# Altium PCB led_drv.PcbDoc
Units mm, origin at the board's own origin, x right, y up, seen from the top; angles counter-clockwise.
Board outline 90 x 50 mm, 2 copper layers (Top Layer, Bottom Layer); 90 components, 96 nets, 338 pads, 59 vias.
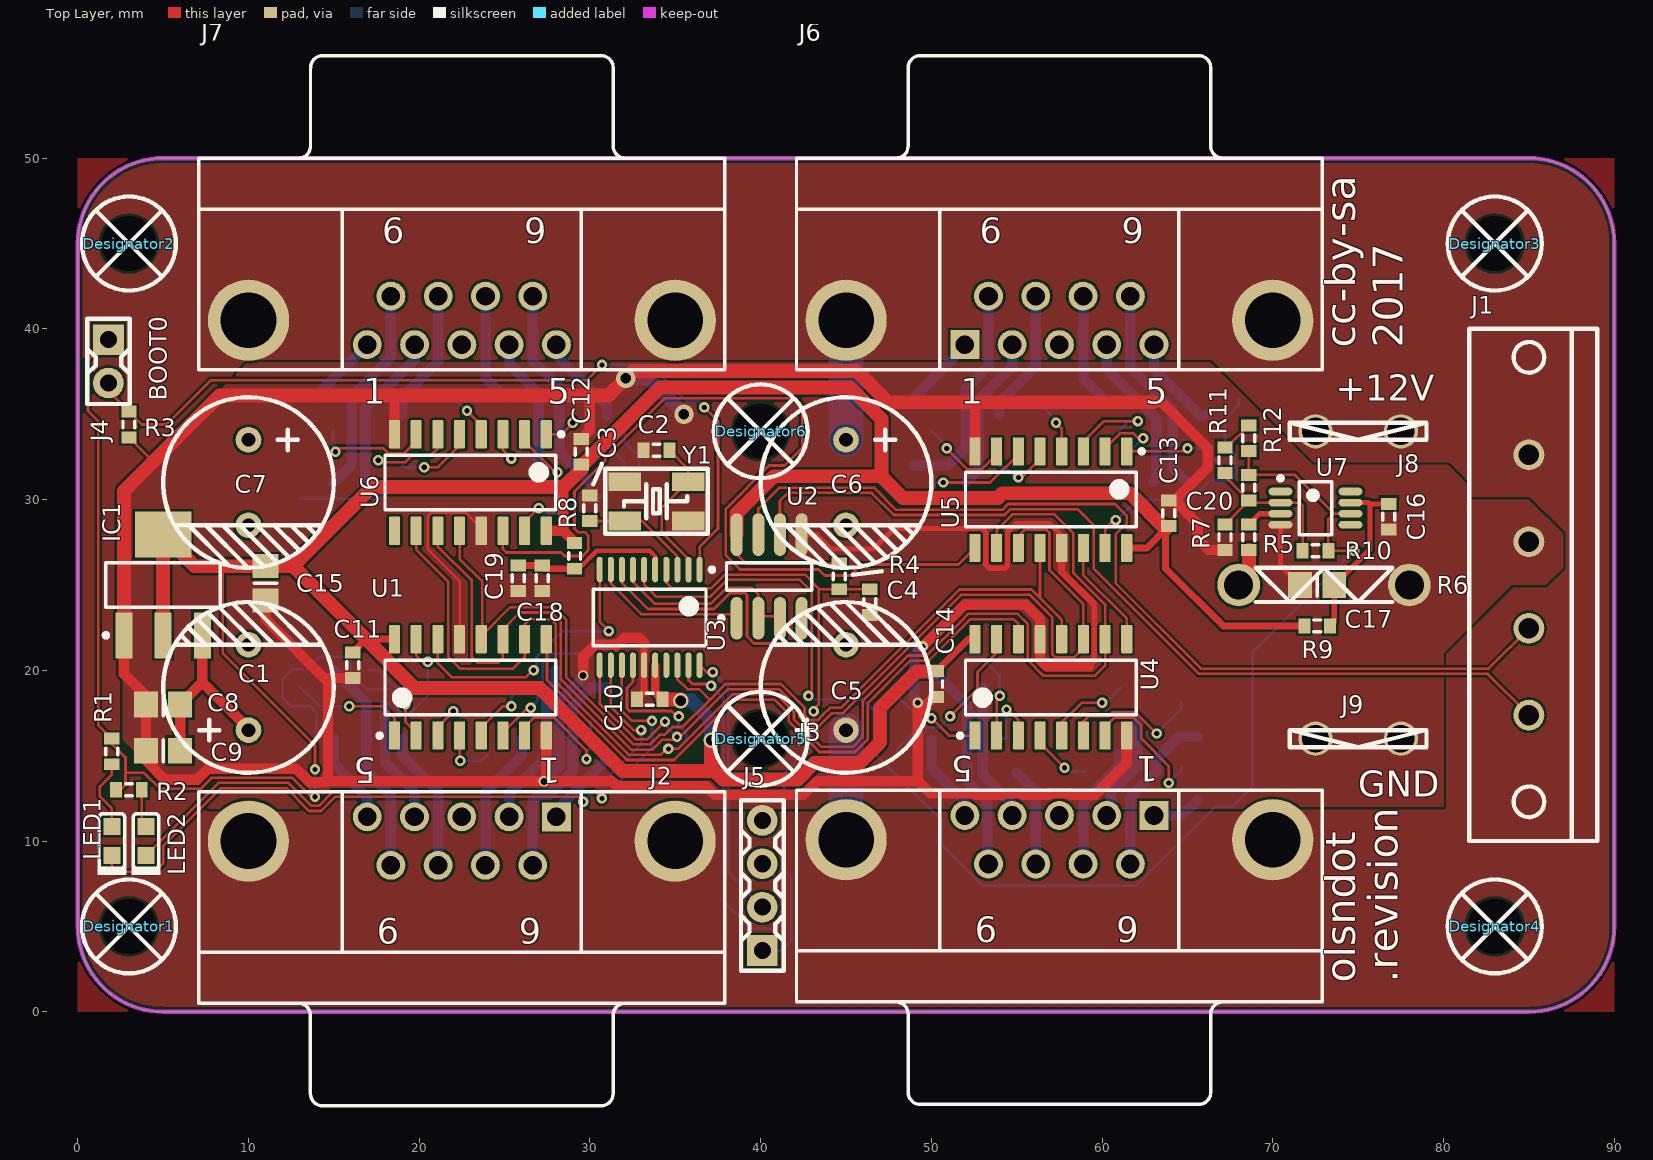
[diagram p0: Top Layer view]
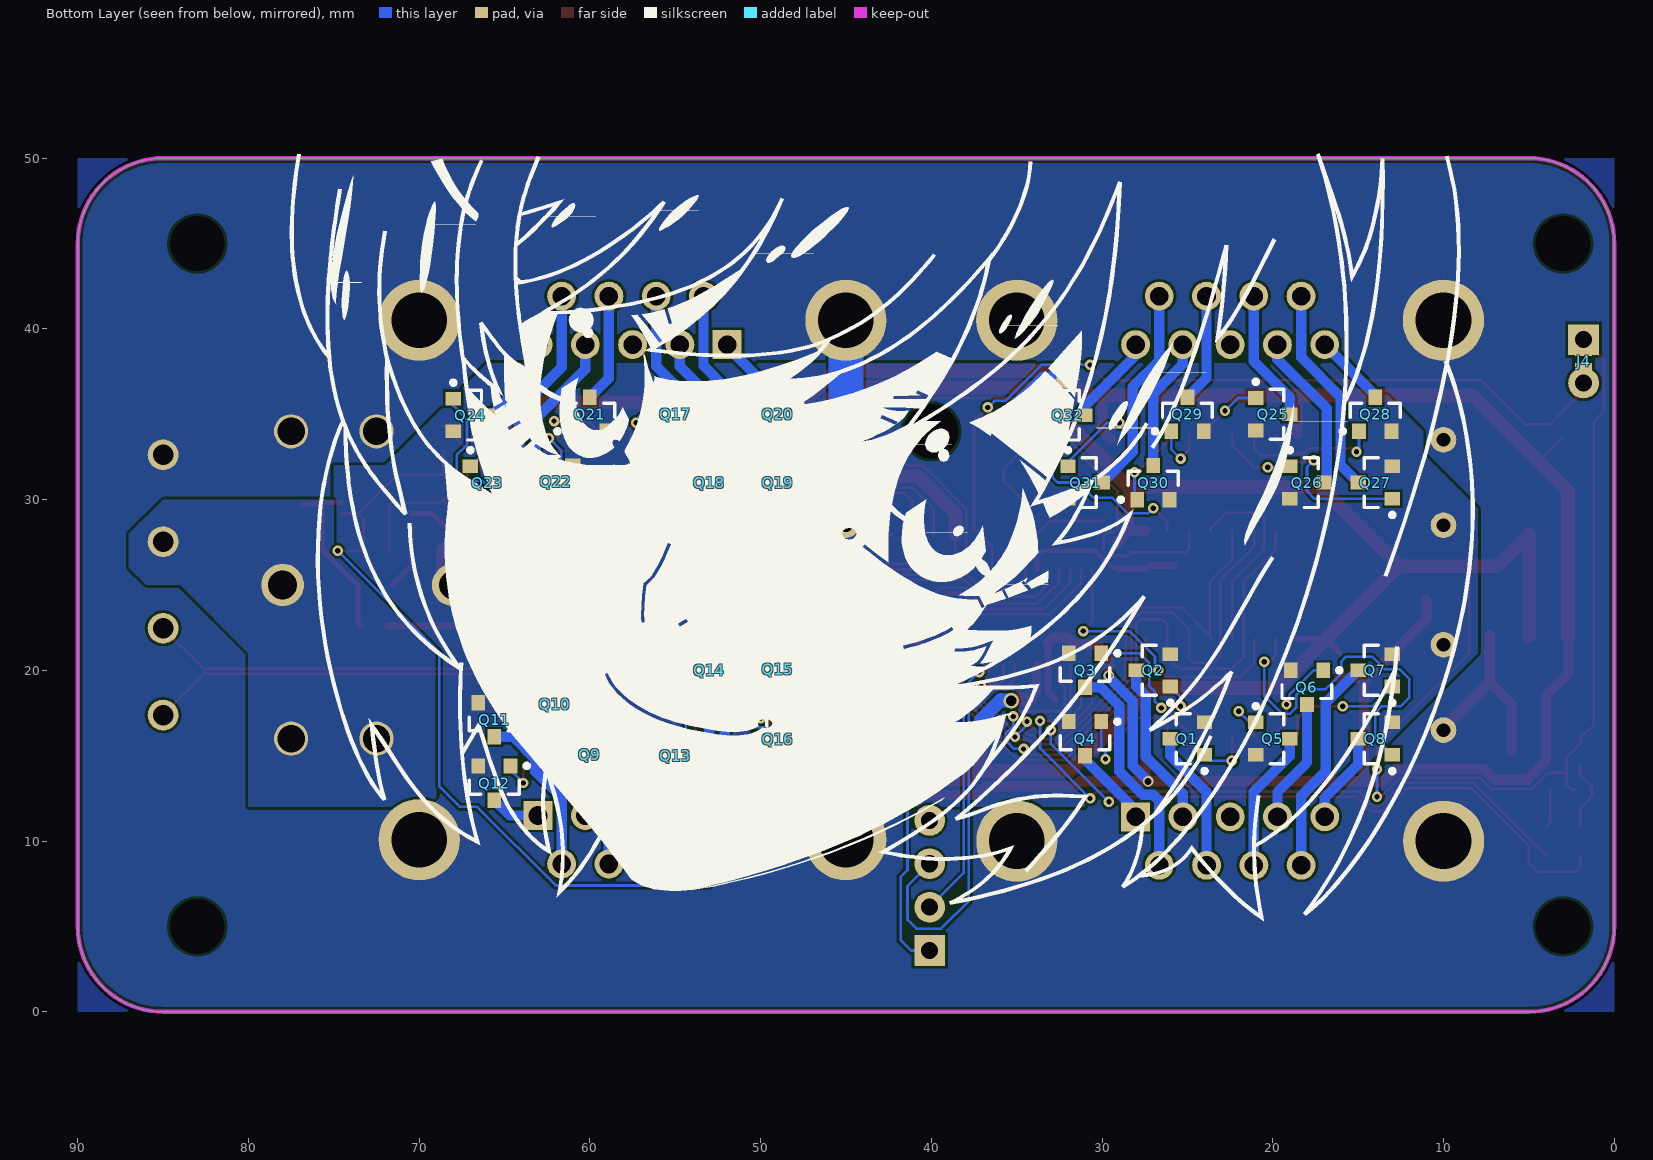
[diagram p1: Bottom Layer view, seen from below]

## Layer stack, top to bottom
Top Solder: solder mask 0.0102, Solder Resist, Dk 3.5
Top Layer: signal copper 0.0356
Dielectric1: dielectric 0.32, FR-4, Dk 4.8
Bottom Layer: signal copper 0.0356
Bottom Solder: solder mask 0.0102, Solder Resist, Dk 3.5

## Board outline
0,5 0,45 cw(c5,45) 5,50 85,50 cw(c85,45) 90,45 90,5 cw(c85,5) 85,0 5,0 cw(c5,5)

## Design rules (kind name [scope] priority, off if disabled: settings)
Clearance [All] p1: gap=0.152
ComponentClearance [All] p1 off: gap=0.254 collisioncheckmode=3 verticalgap=0.254 showdistances=FALSE
FabricationTestPointUsage TestPointUsage [All] p1: valid=0 allowmultiple=FALSE
FabricationTestpoint Testpoint [All] p1: side=3 testpointundercomponent=TRUE minsize=1.016 maxsize=2.54 preferedsize=1.524 minholesize=0 maxholesize=1.016 preferedholesize=0.813 testpointgrid=0.025 allowsidetop=TRUE allowsidebottom=TRUE usegrid=TRUE gridtolerance=0
PolygonConnect PolygonConnect_power [All vs InNetClass('power')] p1: connectstyle=Direct reliefconductorwidth=0.254 reliefentries=4 polygonreliefangle="90 Angle" airgapwidth=0.254
PolygonConnect [All] p2: connectstyle=Relief reliefconductorwidth=0.254 reliefentries=4 polygonreliefangle="90 Angle" airgapwidth=0.254
RoutingVias [All] p1: holewidth=0.711 width=1.27 viastyle="Through Hole" minholewidth=0.254 minwidth=0.61 maxholewidth=25.4 maxwidth=25.4
SilkToSolderMaskClearance SilkscreenOverComponentPads [IsPad] p1: minsilkscreentomaskgap=0.254 clearancetoexposedcopper=TRUE
SolderMaskExpansion [All] p1: expansion=0.102
Width [All] p1: maxlimit=25.4 minlimit=0.152 preferedwidth=0.254 minimp=50.000000 maximp=50.000000 favimp=50.000000
26 further rules are at their usual default settings.

## Classes and differential pairs
component class main: C1 C2 C3 C4 C5 C6 C7 C8 C9 C10 C11 C12 C13 C14 C15 C16 C17 C19 C20 IC1 J1 J3 J5 J6 J7 J8 J9 LED1 LED2 Q1 Q2 Q3 Q4 Q5 Q6 Q7 Q8 Q9 Q10 Q11 Q12 Q13 Q14 Q15 Q16 Q17 Q18 Q19 Q20 Q21 Q22 Q23 Q24 Q25 Q26 Q27 Q28 Q29 Q30 Q31 Q32 R1 R2 R3 R4 R5 R6 R7 R9 R10 R11 R12 U1 U2 U4 U5 U6 U7 Y1
net class power: +12V GND PGND

## Components (designator, comment, footprint, x,y, rotation, side; value= is the part's Value field where it differs from the comment)
C1 "1000/25" ELKO_10mm_RM5 10,19 r90 top locked
C2 "22p" J1-0603 33.9,32.9 r0 top
C3 "22p" J1-0603 30,29.5 r90 top
C4 "47n" J1-0603 46.4,24 r270 top
C5 "1000/25" ELKO_10mm_RM5 45,19 r90 top locked
C6 "1000/25" ELKO_10mm_RM5 45,31 r270 top locked
C7 "1000/25" ELKO_10mm_RM5 10,31 r270 top locked
C8 "10u" 6-0805_M 5,18 r180 top
C9 "1u" 6-0805_M 5,15.3 r180 top
C10 "100n" J1-0603 33.5,18.3 r180 top
C11 "100n" J1-0603 16.1,20.3 r270 top
C12 "100n" J1-0603 29.5,32.8 r90 top
C13 "100n" J1-0603 63.9,29.2 r90 top
C14 "100n" J1-0603 50.3,19.2 r270 top
C15 "1u" 6-0805_M 11,25.1 r270 top
C16 "100n" J1-0603 76.8,29 r270 top
C17 "1u" 6-0805_M 72.6,25 r180 top
C18 "100n" J1-0603 27.2,25.4 r270 top
C19 "1u" J1-0603 25.8,25.4 r270 top
C20 "NP" J1-0603 68.6,30.7 r90 top
Designator1 "Comment" SCREW_M3 3,5 r0 top
Designator2 "Comment" SCREW_M3 3,45 r0 top
Designator3 "Comment" SCREW_M3 83,45 r0 top
Designator4 "Comment" SCREW_M3 83,5 r0 top
Designator5 "Comment" SCREW_M3 40,16 r0 top
Designator6 "Comment" SCREW_M3 40,34 r0 top
IC1 "AZ1117I" SOT223_M 5,25 r90 top
J1 "POWER_BUS" TB_5.08_4P_FLANGE 85,25 r0 top
J2 "Step 1/Strip 1,2/Channel 0-7" DSUB1.385-2H9#1 22.495,0.5 r180 top locked
J3 "Step 2/Strip 3,4/Channel 8-15" DSUB1.385-2H9#1 57.5,0.58 r180 top locked
J4 "BOOT_JMP" JUMPER_2P 1.8,38.1 r0 top
J5 "DEBUG" PINHD_4x1_100mil 40.1,7.4 r180 top
J6 "Step 3/Strip 5,6/Channel 16-23" DSUB1.385-2H9#1 57.5,50 r0 top locked
J7 "Step 4/Strip 7,8/Channel 24-31" DSUB1.385-2H9#2 22.5,50 r0 top locked
J8 "+12V" FS-P_6.35 75,34 r0 top
J9 "GND" FS-P_6.35 75,16 r0 top
LED1 "KP-1608MGC" KING-0603LED_GREEN_V 2,10 r90 top
LED2 "KP-1608MGC" KING-0603LED_GREEN_V 4,10 r90 top
Q1 "IRLML6244TRPbF" ONSC-SOT-23-3-318-08_V 25,16 r0 bottom
Q2 "IRLML6244TRPbF" ONSC-SOT-23-3-318-08_V 27,20 r0 bottom
Q3 "IRLML6244TRPbF" ONSC-SOT-23-3-318-08_V 31,20 r270 bottom
Q4 "IRLML6244TRPbF" ONSC-SOT-23-3-318-08_V 31,16 r270 bottom
Q5 "IRLML6244TRPbF" ONSC-SOT-23-3-318-08_V 20,16 r180 bottom
Q6 "IRLML6244TRPbF" ONSC-SOT-23-3-318-08_V 18,19 r270 bottom
Q7 "IRLML6244TRPbF" ONSC-SOT-23-3-318-08_V 14,20 r0 bottom
Q8 "IRLML6244TRPbF" ONSC-SOT-23-3-318-08_V 14,16 r0 bottom
Q9 "IRLML6244TRPbF" ONSC-SOT-23-3-318-08_V 60,15.05 r0 bottom
Q10 "IRLML6244TRPbF" ONSC-SOT-23-3-318-08_V 62.05,18 r270 bottom
Q11 "IRLML6244TRPbF" ONSC-SOT-23-3-318-08_V 65.6,17.1 r270 bottom
Q12 "IRLML6244TRPbF" ONSC-SOT-23-3-318-08_V 65.6,13.4 r270 bottom
Q13 "IRLML6244TRPbF" ONSC-SOT-23-3-318-08_V 55,15 r270 bottom
Q14 "IRLML6244TRPbF" ONSC-SOT-23-3-318-08_V 53,20 r270 bottom
Q15 "IRLML6244TRPbF" ONSC-SOT-23-3-318-08_V 49,20.05 r0 bottom
Q16 "IRLML6244TRPbF" ONSC-SOT-23-3-318-08_V 49,15.95 r0 bottom
Q17 "IRLML6244TRPbF" ONSC-SOT-23-3-318-08_V 55,35 r180 bottom
Q18 "IRLML6244TRPbF" ONSC-SOT-23-3-318-08_V 53,31 r180 bottom
Q19 "IRLML6244TRPbF" ONSC-SOT-23-3-318-08_V 49,31 r90 bottom
Q20 "IRLML6244TRPbF" ONSC-SOT-23-3-318-08_V 49,35 r90 bottom
Q21 "IRLML6244TRPbF" ONSC-SOT-23-3-318-08_V 60,35 r90 bottom
Q22 "IRLML6244TRPbF" ONSC-SOT-23-3-318-08_V 62,31.05 r0 bottom
Q23 "IRLML6244TRPbF" ONSC-SOT-23-3-318-08_V 66,31 r180 bottom
Q24 "IRLML6244TRPbF" ONSC-SOT-23-3-318-08_V 67,34.95 r180 bottom
Q25 "IRLML6244TRPbF" ONSC-SOT-23-3-318-08_V 20,35 r180 bottom
Q26 "IRLML6244TRPbF" ONSC-SOT-23-3-318-08_V 18,31 r180 bottom
Q27 "IRLML6244TRPbF" ONSC-SOT-23-3-318-08_V 14,31 r0 bottom
Q28 "IRLML6244TRPbF" ONSC-SOT-23-3-318-08_V 14,35 r90 bottom
Q29 "IRLML6244TRPbF" ONSC-SOT-23-3-318-08_V 25,35 r90 bottom
Q30 "IRLML6244TRPbF" ONSC-SOT-23-3-318-08_V 27,31 r90 bottom
Q31 "IRLML6244TRPbF" ONSC-SOT-23-3-318-08_V 31,31 r180 bottom
Q32 "IRLML6244TRPbF" ONSC-SOT-23-3-318-08_V 32,34.95 r180 bottom
R1 "180" J1-0603 2,15.25 r90 top
R2 "180" J1-0603 3,13 r180 top
R3 "47k" J1-0603 3,34.4 r90 top
R4 "47k" J1-0603 44.6,25.5 r90 top
R5 "100" J1-0603 68.6,27.8 r90 top
R6 "0R005" 10x1.5mm_Shunt 73,25 r0 top
R7 "100" J1-0603 67.2,27.8 r90 top
R8 "100" J1-0603 29.1,26.7 r270 top
R9 "100" J1-0603 72.6,22.6 r0 top
R10 "47k" J1-0603 72.5,27 r0 top
R11 "3k3" J1-0603 67.2,32.3 r90 top
R12 "3k3" J1-0603 68.6,33.6 r270 top
U1 "SN74HC595DR" D0016A_M 23,19 r90 top locked
U2 "ST1480ACDR" SO8_M 40.5,25.5 r90 top
U3 "STM32F030F4P6" STM-TSSOP20_L 33.5,23.1 r270 top locked
U4 "SN74HC595DR" D0016A_M 57,19 r90 top locked
U5 "SN74HC595DR" D0016A_M 57,30 r270 top locked
U6 "SN74HC595DR" D0016A_M 23,31 r270 top locked
U7 "MCP6V26-E/MS" MSOP-MS8_L 72.5,29.5 r0 top
Y1 "ABM3B-8.0000MHZ-B2-T" XTAL_MJ_5x3.2 33.9,29.9 r180 top

## Footprints (in the part's own frame and the unit in brackets; to place one, negate y for a bottom-side part, rotate by r counter-clockwise, add the part's x,y. Pads: shape width x height; smd on the part's side, far side on the other; paste and mask are expansions set on the pad)
6-0805_M [mm] "Chip Resistor, Body 2.0x1.2mm, IPC Low Density"
  rect 1.4x1.5 smd: 1(-1,0) 2(1,0)
  silkscreen extent 0,-0.65 0,0.65, body extent -1.07,-0.7 1.07,0.7, height 0.7
10x1.5mm_Shunt [mm]
  round 2.5 hole 1.7: 1(-5,0) 2(5,0)
  silkscreen extent -4,-1 4,1
D0016A_M [mm] "SOIC, 16-Leads, Body 10x4mm, Pitch 1.27mm, IPC Low Density"
  rrect15% 1.65x0.65 smd: 1(-2.825,4.445) 2(-2.825,3.175) 3(-2.825,1.905) 4(-2.825,0.635) 5(-2.825,-0.635) 6(-2.825,-1.905) 7(-2.825,-3.175) 8(-2.825,-4.445) 9(2.825,-4.445) 10(2.825,-3.175) 11(2.825,-1.905) 12(2.825,-0.635) 13(2.825,0.635) 14(2.825,1.905) 15(2.825,3.175) 16(2.825,4.445)
  silkscreen extent -2.95,-5 1.6,5.44, body extent -3,-4.95 3,4.95, height 1.59
DSUB1.385-2H9#1 [mm] "Connector; D Subminiature; 9 Position; Right Angle; Pitch 1.385 mm"
  rect 1.69x1.69 hole 1.09: 1(-5.54,-10.92)
  round 1.69 hole 1.09: 2(-2.77,-10.92) 3(0,-10.92) 4(2.77,-10.92) 5(5.54,-10.92) 6(-4.155,-8.08) 7(-1.385,-8.08) 8(1.385,-8.08) 9(4.155,-8.08)
  round 4.76 hole 3.26: 10(-12.495,-9.5) 11(12.495,-9.5)
  silkscreen extent -15.4,-12.4 15.4,6
DSUB1.385-2H9#2 [mm] "Connector; D Subminiature; 9 Position; Right Angle; Pitch 1.385 mm"
  round 1.69 hole 1.09: 1(-5.54,-10.92) 2(-2.77,-10.92) 3(0,-10.92) 4(2.77,-10.92) 5(5.54,-10.92) 6(-4.155,-8.08) 7(-1.385,-8.08) 8(1.385,-8.08) 9(4.155,-8.08)
  round 4.76 hole 3.26: 10(-12.495,-9.5) 11(12.495,-9.5)
  silkscreen extent -15.4,-12.4 15.4,6
ELKO_10mm_RM5 [mm]
  round 1.5 hole 0.8: 1(-2.5,0) 2(2.5,0)
  silkscreen extent -5,-5 5,5
FS-P_6.35 [mm]
  round 2 hole 1.6: 1(-2.5,0) 1(2.5,0)
  silkscreen extent -4,-0.5 4,0.5
J1-0603 [mm]
  rect 0.7x0.9 smd: 1(-0.75,0) 2(0.75,0)
  silkscreen extent -0.2,-0.35 0.2,0.35, body extent -0.85,-0.48 0.85,0.48, height 0.9
JUMPER_2P [mm]
  rect 1x0.6 smd far side: 1(0,0.6) 2(0,-0.4)
  rect 1.8x1.8 hole 1: 1(0,1.27)
  round 1.8 hole 1: 2(0,-1.27)
  silkscreen extent -1.25,-2.5 1.25,2.5
KING-0603LED_GREEN_V [mm] "SMT LED, 2-Leads, Body 1.6x0.8mm (0603-Size)"
  rect 1x1 smd paste+0 mask+0: 1(0.85,0) 2(-0.85,0)
  silkscreen extent -1.97,-0.85 1.6,0.85, body extent -0.92,-0.53 1.09,0.53, height 1.1
MSOP-MS8_L [mm] "TSOP, 8-Leads, Body 3x3mm, Pitch 0.65mm, IPC High Density"
  oval 1.4x0.45 smd: 1(-2.05,0.975) 2(-2.05,0.325) 3(-2.05,-0.325) 4(-2.05,-0.975) 5(2.05,-0.975) 6(2.05,-0.325) 7(2.05,0.325) 8(2.05,0.975)
  silkscreen extent -2.17,-1.55 0.95,1.87, body extent -1.55,-1.55 1.55,1.55, height 1.1
ONSC-SOT-23-3-318-08_V [mm] "SOT23, 3-Leads, Body 2.92x1.3mm, Pitch 0.95mm"
  rect 0.9x0.8 smd: 1(-1,0.95) 2(-1,-0.95) 3(1,0)
  silkscreen extent -1.12,-1.46 0.65,2.02, body extent -0.65,-1.46 0.65,1.46, height 1.11
PINHD_4x1_100mil [mm]
  rect 1.8x1.8 hole 1: 1(0,3.81)
  round 1.8 hole 1: 2(0,1.27) 3(0,-1.27) 4(0,-3.81)
  silkscreen extent -1.25,-5 1.25,5
SCREW_M3 [mm]
  round 0 hole 3.2 unplated: 1(0,0)
  silkscreen extent -2.75,-2.75 2.75,2.75
SO8_M [mm] "SOIC, 8-Leads, Body 4.9x3.9mm, Pitch 1.27mm, IPC Low Density"
  oval 2.5x0.7 smd: 1(-2.45,1.905) 2(-2.45,0.635) 3(-2.45,-0.635) 4(-2.45,-1.905) 5(2.45,-1.905) 6(2.45,-0.635) 7(2.45,0.635) 8(2.45,1.905)
  silkscreen extent -2.57,-2.5 0.8,2.93, body extent -2,-2.5 2,2.5, height 1.75
SOT223_M [mm] "SOT223, 4-Leads, Body 6.5x3.5mm, Pitch 2.3mm, Lead Span 7mm, IPC Low Density"
  rect 2.7x1 smd: 1(-2.95,2.3) 2(-2.95,0) 3(-2.95,-2.3)
  rect 2.7x3.3 smd: 4(2.95,0)
  silkscreen extent -3.07,-3.35 1.3,3.47, body extent -1.85,-3.35 1.85,3.35, height 1.7
STM-TSSOP20_L [mm] "SOP, 20-Leads, Body 6.6x4.5mm, Pitch 0.65mm, IPC High Density"
  oval 1.5x0.35 smd: 1(-2.8,2.925) 2(-2.8,2.275) 3(-2.8,1.625) 4(-2.8,0.975) 5(-2.8,0.325) 6(-2.8,-0.325) 7(-2.8,-0.975) 8(-2.8,-1.625) 9(-2.8,-2.275) 10(-2.8,-2.925) 11(2.8,-2.925) 12(2.8,-2.275) 13(2.8,-1.625) 14(2.8,-0.975) 15(2.8,-0.325) 16(2.8,0.325) 17(2.8,0.975) 18(2.8,1.625) 19(2.8,2.275) 20(2.8,2.925)
  silkscreen extent -2.92,-3.3 1.65,3.78, body extent -2.25,-3.3 2.25,3.3, height 1.2
TB_5.08_4P_FLANGE [mm] "Pluggable Terminal Block, vertical, pitch 5.08mm, with flange"
  round 1.8 hole 1.2: 1(0,7.62) 2(0,2.54) 3(0,-2.54) 4(0,-7.62)
  silkscreen extent -3.5,-15 4,15
XTAL_MJ_5x3.2 [mm]
  rect 1.9x1.1 smd: 1(-1.85,-1.15) 2(1.85,-1.15) 3(1.85,1.15) 4(-1.85,1.15)
  silkscreen extent -3,-1.9 3,1.9

## Part data
C1 C5 C6 C7: library part ELKO
C2 C3 C4 C8 C9 C10 C11 C12 C13 C14 C15 C16 C17 C18 C19 C20: library part C, "Capacitor"
IC1: "LDO, industrial temp range"
J1: library part Phoenix_PT1,5/4-5,0H
J2 J3 J6 J7: library part "D Connector 9", "Receptacle Assembly, 9 Position, Right Angle"
J4: library part JUMPER, "Jumper"
J5: library part PH_4x1, "Pin Header 4x1 pin"
J8 J9: library part TESTPOINT
LED1 LED2: library part CMP-0404-00001-1, "LED, SMT, 0603(1608), 1.1mm thickness, Green"
Q1 Q2 Q3 Q4 Q5 Q6 Q7 Q8 Q9 Q10 Q11 Q12 Q13 Q14 Q15 Q16 Q17 Q18 Q19 Q20 Q21 Q22 Q23 Q24 Q25 Q26 Q27 Q28 Q29 Q30 Q31 Q32: library part CMP-1058-00794-1, "Power MOSFET, 500 mA, 60 V, N-Channel, 3-Pin SOT-23, Pb-Free, Tape and Reel"
R1 R2 R3 R4 R5 R6 R7 R8 R9 R10 R11 R12: library part R, "Resistor"
U1 U4 U5 U6: library part CMP-0780-00037-3, "8-Bit Shift Registers With 3-State Output Registers, D0016A, LARGE T&R"
U2: library part IN-LNTX-DS75176B, "Multipoint RS-485/RS-422 Transceiver, 8-pin Narrow SOIC"
U3: library part CMP-0304-00039-2, "ARM Cortex-M0 32-bit MCU, 16 KB Flash, 4 KB Internal RAM, 15 I/Os, 20-pin TSSOP, -40 to 85 degC, Tube"
U7: library part CMP-0187-00815-1, "620 μA, 2 MHz Auto-Zeroed Op Amp, 8-Pin MSOP, Extended Temperature"
Y1: library part ABRA-ABM3B-4, "Crystal, SMD, 25.000000MHz Stab=50ppm 18.0pF"

## Via types
v1: diameter 0.61, hole 0.305, Top Layer to Bottom Layer, tented both sides, 53 vias
v2: diameter 1.118, hole 0.61, Top Layer to Bottom Layer, tented both sides, 2 vias
v3: diameter 0.914, hole 0.61, Top Layer to Bottom Layer, tented both sides, 2 vias
v4: diameter 0.61, hole 0.406, Top Layer to Bottom Layer, tented both sides, 2 vias

## Nets (pads, with @x,y where several pads share a name; then routed paths per layer and width w, separated by ;. In a path a pad name is that pad's centre, name@x,y a point inside that pad or via, vN(x,y) a via of type N, cw(c..) or ccw(c..) an arc to the next point about the centre after c; other vN are vias at no path point)
+12V: C1.1 C5.1 C6.1 C7.1 C8.1 C9.1 IC1.3 J1.1 J2.10 J2.11 J3.10 J3.11 J6.10 J6.11 J7.10 J7.11 J8.1 | length 24.6
  Top Layer w0.61: C9.1 C8.1 7.3,19.3 ; IC1.3 7.3,19.3 ; C1.1 10,16.6 7.3,19.3
  Bottom Layer w2.032: J7.10@10,40.495 J7.10 ; C5.1 45,10.085 J3.11 ; C6.1 45,40.495 J6.10
AVCC: C16.1 C17.1 R9.2 U7.7 | length 10.4
  Top Layer w0.305: R9.2 73.6,22.85 C17.1 73.629,25 75.7,27.071 75.7,29.7 ; U7.7 75.575,29.825 75.7,29.7 ; C16.1 75.75,29.75 75.7,29.7
AVCC2: C18.1 C19.1 R8.2 U3.5 | length 9.5
  Top Layer w0.254: R8.2 29.15,26 29.4,26 30.4,27 33.5,27 33.825,26.675 U3.5@33.825,26.375
  Top Layer w0.305: U3.5 U3.5@33.825,26.375
  Top Layer w0.406: C19.1 C18.1 27.4,25.95 R8.2
BOOT0: J4.2 R3.2 U3.1 | length 48.9
  Top Layer w0.152: J4.2@1.8,36.83 1.8,36.35 R3.2 3.75,34.4 5.2,34.4 7.8,37 29.817,37 v1(30.709,37.891) ; U3.1 36.425,27.225 37.5,28.3 37.5,34.6 v1(36.7,35.4)
  Bottom Layer w0.152: v1(30.709,37.891) 33.547,37.891 35.651,35.787 36.313,35.787 v1(36.7,35.4)
CH0: J2.1 Q4.3 | length 4.8
  Bottom Layer w0.61: J2.1 28.035,11.813 29.284,13.062 31,14.778 Q4.3
CH1: J2.6 Q3.3 | length 13.2
  Bottom Layer w0.61: J2.6@26.572,8.163 J2.6@26.655,8.08 ; J2.6 26.65,12.372 27.001,12.722 27.622,12.722 29,14.1 29,17.922 30.078,19 Q3.3
CH2: J2.2 Q2.3 | length 10.2
  Bottom Layer w0.61: J2.2@25.27,10.92 25.27,12.77 27.438,14.938 27.438,18.516 28,19.078 Q2.3
CH3: J2.7 Q1.3 | length 8.8
  Bottom Layer w0.61: J2.7@23.885,8.08 23.885,12.885 26,15 Q1.3
CH4: J2.8 Q5.3 | length 8.8
  Bottom Layer w0.61: Q5.3 19,15 21.115,12.885 J2.8@21.115,8.08
CH5: J2.4 Q6.3 | length 7.3
  Bottom Layer w0.61: Q6.3 18,14.6 19.725,12.875 J2.4
CH6: J2.9 Q7.3 | length 13.3
  Bottom Layer w0.61: Q7.3 16.9,18.1 16.9,14.1 18.345,12.655 J2.9@18.345,8.08
CH7: J2.5 Q8.3 | length 5.9
  Bottom Layer w0.61: Q8.3 15,14.5 16.96,12.54 J2.5@16.96,10.92
CH8: J3.1 Q12.3 | length 2.9
  Bottom Layer w0.61: J3.1 64.7,11.5 Q12.3
CH9: J3.6 Q11.3 | length 9.7
  Bottom Layer w0.61: J3.6 61.655,12.555 63.2,14.1 63.2,14.8 64.5,16.1 Q11.3
CH10: J3.2 Q10.3 | length 6.3
  Bottom Layer w0.61: J3.2 60.652,11.882 60.544,11.99 60.544,12.844 62.05,14.35 Q10.3
CH11: J3.7 Q9.3 | length 7.3
  Bottom Layer w0.61: J3.7 58.885,12.285 61,14.4 Q9.3
CH12: J3.8 Q13.3 | length 5.8
  Bottom Layer w0.61: Q13.3 56.115,12.885 J3.8
CH13: J3.4 Q14.3 | length 8.2
  Bottom Layer w0.61: Q14.3 53,13.9 54.73,12.17 J3.4
CH14: J3.9 Q15.3 | length 12.8
  Bottom Layer w0.61: Q15.3 52.1,17.95 52.1,13.5 53.262,12.338 53.262,8.743 J3.9
CH15: J3.5 Q16.3 | length 5.3
  Bottom Layer w0.61: Q16.3 50,14.3 51.96,12.34 J3.5
CH16: J6.1 Q20.3 | length 4.3
  Bottom Layer w0.61: Q20.3 51.96,38.96 J6.1
CH17: J6.6 Q19.3 | length 12.9
  Bottom Layer w0.61: Q19.3 51,32 52,33 52,36.5 53.345,37.845 J6.6
CH18: J6.2 Q18.3 | length 9.2
  Bottom Layer w0.61: Q18.3 52.762,31.762 52.762,35.84 54.73,37.808 J6.2
CH19: J6.7 Q17.3 | length 7.8
  Bottom Layer w0.61: Q17.3 54,35.7 56.115,37.815 J6.7
CH20: J6.8 Q21.3 | length 6.4
  Bottom Layer w0.61: J6.8 58.885,37.115 Q21.3
CH21: J6.4 Q22.3 | length 9.3
  Bottom Layer w0.61: J6.4 60.27,37.63 63.162,34.738 63.162,31.212 Q22.3
CH22: J6.9 Q23.3 | length 12.3
  Bottom Layer w0.61: J6.9 61.655,37.745 64.138,35.262 64.138,31.862 Q23.3
CH23: J6.5 Q24.3 | length 5.5
  Bottom Layer w0.61: J6.5 63.04,37.66 65.75,34.95 Q24.3
CH24: J7.1 Q28.3 | length 4.3
  Bottom Layer w0.61: Q28.3 14,36.12 J7.1
CH25: J7.6 Q27.3 | length 12.3
  Bottom Layer w0.61: Q27.3 16.038,32.038 16.038,36.038 18.345,38.345 J7.6
CH26: J7.2 Q26.3 | length 9.3
  Bottom Layer w0.61: Q26.3 16.838,31.162 16.838,35.338 19.73,38.23 J7.2
CH27: J7.7 Q25.3 | length 7.8
  Bottom Layer w0.61: Q25.3 19,36 21.115,38.115 J7.7
CH28: J7.8 Q29.3 | length 6.4
  Bottom Layer w0.61: J7.8 23.885,37.115 Q29.3
CH29: J7.4 Q30.3 | length 7.8
  Bottom Layer w0.61: J7.4 25.27,37.93 27,36.2 Q30.3
CH30: J7.9 Q31.3 | length 12.3
  Bottom Layer w0.61: J7.9 26.655,38.145 28.2,36.6 28.2,32.8 Q31.3
CH31: J7.5 Q32.3 | length 5.4
  Bottom Layer w0.61: J7.5 28.04,38.46 31,35.5 Q32.3
CLR: U1.10 U3.14 U4.10 U5.10 U6.10 | length 88.8
  Top Layer w0.152: U6.10 19.825,27.075 21.7,25.2 21.7,20.8 22.4,20.1 25.5,20.1 26.175,20.775 U1.10@26.175,21.7 ; U1.10 26.175,22.675 26.5,23 27.715,23 27.999,22.716 27.999,19.352 28.803,18.547 28.803,18.537 32.288,15.052 34.148,15.052 34.548,15.452 v1(34.6,15.4) 35.154,15.4 38.345,18.59 40.941,18.59 41.957,17.574 41.957,17.127 43.562,15.521 45.405,15.521 45.979,16.095 45.979,18.21 48.636,20.867 49.721,20.867 51.697,22.842 52.159,23.305 55.06,23.305 55.649,22.716 55.649,20.597 56.551,19.695 59.595,19.695 60.175,20.275 U4.10 60.175,23.867 58.3,25.742 58.3,28.039 57.207,29.132 54.753,29.132 53.825,28.203 U5.10 U5.10@53.825,27 ; U3.14 32.525,19.325 32.171,18.971 32.171,17.755 32.305,17.621 34.781,17.621 35.2,17.202 v1(35.2,17.3)
  Bottom Layer w0.152: v1(34.6,15.4) 35.154,15.4 35.633,15.879 35.633,16.321 35.2,16.754 v1(35.2,17.3)
DC1: U1.9 U4.14 | length 40.4
  Top Layer w0.152: U1.9 27.486,21.784 27.486,19.434 28.499,18.421 28.499,18.411 32.162,14.747 34.933,14.747 38.471,18.286 40.814,18.286 41.652,17.448 41.652,17 43.436,15.217 45.532,15.217 46.283,15.968 46.283,18.083 48.762,20.562 49.847,20.562 52.001,22.716 52.285,23 54.8,23 55.095,22.705 U4.14
DC2: U4.9 U5.14 | length 6.8
  Top Layer w0.152: U5.14@58.905,27.595 U5.14 58.905,25.568 61.445,23.028 U4.9
DC3: U5.9 U6.14 | length 53.2
  Top Layer w0.152: U6.14 24.905,27.1 25.105,26.9 28.3,26.9 28.5,26.7 29.573,26.7 29.9,27.027 29.9,27.9 29.7,28.1 29.3,28.1 29.1,28.3 29.1,30.481 30.9,32.281 30.9,32.462 34.372,35.933 42.021,35.933 42.433,35.521 42.433,33.033 41.4,32 40.502,32 37.96,29.458 37.96,26.74 38.79,25.91 43.39,25.91 43.748,25.552 45.252,25.552 45.9,26.2 51.58,26.2 U5.9
GATE0: Q4.1 U1.7 | length 8
  Top Layer w0.152: U1.7 26.175,16.675 26.729,17.229 27.885,17.229 29.8,15.313 v1(29.8,14.8)
  Bottom Layer w0.152: v1(29.8,14.8) 29.8,15.2 30.05,15.45 Q4.1
GATE1: Q3.1 U1.6 | length 8.4
  Top Layer w0.152: U1.6 24.905,16.35 26.355,17.8 v1(26.534,17.8)
  Bottom Layer w0.152: v1(26.534,17.8) 26.905,18.171 26.905,18.737 27.233,19.065 27.233,20.433 27.8,21 Q3.1
GATE2: Q2.1 U1.5 | length 4.1
  Top Layer w0.152: U1.5 23.635,16.635 24.9,17.9 v1(25.4,17.9)
  Bottom Layer w0.152: v1(25.4,17.9) 25.4,18.45 Q2.1
GATE3: Q1.1 U1.4 | length 3.2
  Top Layer w0.152: U1.4 22.365,14.735 v1(22.4,14.7)
  Bottom Layer w0.152: v1(22.4,14.7) 23.65,14.7 Q1.1
GATE4: Q5.1 U1.3 | length 3.1
  Top Layer w0.152: U1.3 21.095,16.695 v1(22,17.6)
  Bottom Layer w0.152: Q5.1 21.35,16.95 v1(22,17.6)
GATE5: Q6.1 U1.2 | length 5.3
  Top Layer w0.152: v1(19.2,18) 19.2,16.975 19.825,16.35 U1.2
  Bottom Layer w0.152: Q6.1 17.604,20 19.045,18.559 19.045,18.155 v1(19.2,18)
GATE6: Q7.1 U1.1 | length 7.3
  Top Layer w0.152: v1(15.9,17.9) 17.855,17.9 18.555,17.2 U1.1
  Bottom Layer w0.152: Q7.1 14.15,17.9 v1(15.9,17.9)
GATE7: Q8.1 U1.15 | length 21.8
  Top Layer w0.152: U1.15 19.825,20.875 20.2,20.5 v1(20.5,20.5)
  Bottom Layer w0.152: Q8.1 14,16.05 14,17.5 13.6,17.9 12.5,17.9 12,18.4 12,19.5 12.573,20.073 13.473,20.073 14.2,20.8 15.7,20.8 16,20.5 16,19.8 16.9,18.9 18.273,18.9 18.629,18.545 18.629,17.817 18.979,17.467 19.467,17.467 20.5,18.5 v1(20.5,20.5)
GATE8: Q12.1 U4.7 | length 8.4
  Top Layer w0.152: U4.7 60.175,16.675 60.729,17.229 61.836,17.229 62.3,16.765 62.3,16 63.9,14.4 v1(63.9,13.4)
  Bottom Layer w0.152: v1(63.9,13.4) 64.65,14.15 Q12.1
GATE9: Q11.1 U4.6 | length 8.3
  Top Layer w0.152: U4.6 58.905,17.005 59.2,17.3 60.369,17.3 60.602,17.533 61.967,17.533 v1(63.2,16.3)
  Bottom Layer w0.152: v1(63.2,16.3) 64.65,17.75 Q11.1
GATE10: Q10.1 U4.5 | length 5.1
  Top Layer w0.152: U4.5 57.635,16.935 58.8,18.1 v1(60,18.1)
  Bottom Layer w0.152: v1(60,18.1) 60.2,18.1 Q10.1
GATE11: Q9.1 U4.4 | length 3.8
  Top Layer w0.152: U4.4 56.365,15.735 v1(57.8,14.3)
  Bottom Layer w0.152: v1(57.8,14.3) 58,14.1 Q9.1
GATE12: Q13.1 U4.3 | length 4.3
  Top Layer w0.152: v1(54.4,17.7) 54.4,17.4 54.6,17.6 55.095,17.105 U4.3
  Bottom Layer w0.152: Q13.1 54.379,16 54.379,17.679 v1(54.4,17.7)
GATE13: Q14.1 U4.2 | length 6.1
  Top Layer w0.152: U4.2 53.825,18.325 v1(54,18.5)
  Bottom Layer w0.152: Q14.1 52.7,21 54,19.7 v1(54,18.5)
GATE14: Q15.1 U4.1 | length 6.1
  Top Layer w0.152: v1(50,17.2) 51.025,16.175 U4.1
  Bottom Layer w0.152: Q15.1 48,18.5 49.3,17.2 v1(50,17.2)
GATE15: Q16.1 U4.15 | length 9.9
  Top Layer w0.152: v1(51.1,17.3) 52.7,18.9 52.7,19.9 53.825,21.025 U4.15
  Bottom Layer w0.152: Q16.1 48,15.4 49.267,16.667 50.467,16.667 v1(51.1,17.3)
GATE16: Q20.1 U5.7 | length 5.5
  Top Layer w0.152: v1(50.9,33) 52.129,31.771 52.946,31.771 53.825,32.65 U5.7
  Bottom Layer w0.152: Q20.1 50,34.05 50.9,33.15 v1(50.9,33)
GATE17: Q19.1 U5.6 | length 6.8
  Top Layer w0.152: v1(50.7,31) 53.445,31 55.095,32.65 U5.6
  Bottom Layer w0.152: Q19.1 49.95,30.65 50.3,31 v1(50.7,31)
GATE18: Q18.1 U5.5 | length 3.5
  Top Layer w0.152: v1(55.1,31.3) 55.3,31.3 56.365,32.365 U5.5
  Bottom Layer w0.152: Q18.1 54.25,31.95 54.9,31.3 v1(55.1,31.3)
GATE19: Q17.1 U5.4 | length 3.8
  Top Layer w0.152: v1(57.3,34.5) 57.635,34.165 U5.4
  Bottom Layer w0.152: Q17.1 57.3,34.65 v1(57.3,34.5)
GATE20: Q21.1 U5.3 | length 5.7
  Top Layer w0.152: U5.3 58.905,33.405 60.1,34.6 v1(62.1,34.6)
  Bottom Layer w0.152: Q21.1 61.55,34.6 v1(62.1,34.6)
GATE21: Q22.1 U5.2 | length 7
  Top Layer w0.152: U5.2 60.175,33 61.054,33.879 61.836,33.879 62.115,33.6 v1(62.4,33.6)
  Bottom Layer w0.152: Q22.1 61,30.827 61.679,31.505 61.679,32.879 v1(62.4,33.6)
GATE22: Q23.1 U5.1 | length 6.1
  Top Layer w0.152: U5.1 64.825,32.825 v1(65,33)
  Bottom Layer w0.152: v1(65,33) 65.95,33 Q23.1
GATE23: Q24.1 U5.15 | length 15.1
  Top Layer w0.152: U5.15 60.175,28.275 60.7,28.8 v1(60.8,28.8)
  Bottom Layer w0.152: v1(60.8,28.8) 60.873,28.8 62.073,30 65.2,30 66.3,31.1 67.5,31.1 67.8,31.4 67.8,32.6 67.2,33.2 67.2,34.7 68,35.5 Q24.1
GATE24: Q28.1 U6.7 | length 6.9
  Top Layer w0.152: v1(15.1,32.8) 15.3,33 17.9,33 18.2,32.7 19.1,32.7 19.825,33.425 U6.7
  Bottom Layer w0.152: Q28.1 14.95,32.95 v1(15.1,32.8)
GATE25: Q27.1 U6.6 | length 11.6
  Top Layer w0.152: v1@17.833,32.2 19.2,32.2 19.6,32.6 20.7,32.6 21.095,32.995 U6.6
  Bottom Layer w0.152: Q27.1 17.55,30.05 18,30.5 18,31.9 v1(17.6,32.3)
GATE26: Q26.1 U6.5 | length 4.6
  Top Layer w0.152: v1(20.3,31.9) 21.1,31.9 22.365,33.165 U6.5
  Bottom Layer w0.152: Q26.1 19.05,32 19.15,31.9 v1(20.3,31.9)
GATE27: Q25.1 U6.4 | length 3.8
  Top Layer w0.152: v1(22.8,35.2) 23.635,34.365 U6.4
  Bottom Layer w0.152: Q25.1 22.05,35.95 v1(22.8,35.2)
GATE28: Q29.1 U6.3 | length 3.5
  Top Layer w0.152: U6.3 24.905,32.895 v1(25.4,32.4)
  Bottom Layer w0.152: v1(25.4,32.4) 25.95,32.95 Q29.1
GATE29: Q30.1 U6.2 | length 4.7
  Top Layer w0.152: U6.2 26.175,33.414 27.989,31.6 v1(28.1,31.6)
  Bottom Layer w0.152: Q30.1 28.1,30.15 v1(28.1,31.6)
GATE30: Q31.1 U6.1 | length 6
  Top Layer w0.152: U6.1 28.325,33.825 v1(29,34.5)
  Bottom Layer w0.152: v1(29,34.5) 29.7,34.5 32,32.2 Q31.1
GATE31: Q32.1 U6.15 | length 13.9
  Top Layer w0.152: U6.15 26.175,28.675 v1(27,29.5)
  Bottom Layer w0.152: v1(27,29.5) 27.3,29.2 28.497,29.2 29.397,30.1 30.5,30.1 31.4,31 32.6,31 32.9,31.3 32.9,32.5 32.05,33.35 32.05,34.45 33,35.4 Q32.1
GND: C2.1 C3.2 C4.2 C8.2 C9.2 C10.2 C11.2 C12.2 C13.2 C14.2 C15.2 C16.2 C17.2 C18.2 C19.2 IC1.1 J1.2 J5.4 J9.1 R3.1 R6.2 R7.1 U1.8 U1.13 U2.5 U3.15 U4.8 U4.13 U5.8 U5.13 U6.8 U6.13 U7.4 Y1.2 Y1.4 | length 272.2
  Top Layer w0.152: R3.1 4.35,32.3 4.35,32.15 ; U1.13 22.365,25.235 20.5,27.1 20.5,29.025 20.704,29.229 22.756,29.229 23.635,28.35 U6.13
  Top Layer w0.305: U2.5 43.25,27.95 44.1,27.1 46.6,27.1 47.805,28.305 52.978,28.305 53.185,28.098 53.185,26.181 53.383,25.983 54.33,25.983 54.465,26.118 54.465,28.098 54.977,28.61 56.914,28.61 57.635,27.889 U5.13 ; 59.228,20.228 59.535,20.535 59.535,23.865 59.459,23.941 ; U7.4 70.45,26.15 C17.2
  Top Layer w0.406: C10.2 33.175,18.725 U3.15 33.175,21.625 ; v2(35.5,35) v2@35.9,35 ; U5.13 57.635,25.765 59.459,23.941
  Top Layer w0.61: IC1.1 2.7,19.8 4,18.5 C8.2 C9.2 4,14.695 5.095,13.6 7,13.6 7.643,14.243 12.779,14.243 13.584,13.438 14.538,13.438 14.6,13.5 ; C15.2 11,23 14.6,19.4 ; C11.2 14.75,19.55 14.6,19.4 ; U6.8 18.555,36.064 19.864,36.064 ; U1.8 27.445,13.645 v4(27.3,13.5) ; C12.2 30,34.05 30,36.1 ; v4(29.6,19.7) 29.6,20.794 30.313,21.507 31.487,21.507 31.55,21.444 32.006,21.9 32.9,21.9 33.175,21.625 ; v1(49.2,18.1) 49.2,17.478 ; 49.238,13.5 49.936,12.802 52.499,12.802 52.602,12.7 54.088,12.7 54.191,12.802 55.269,12.802 55.372,12.7 56.858,12.7 56.961,12.802 58.039,12.802 58.142,12.7 59.6,12.7 61.445,14.545 U4.8 ; v1(49.5,21.4) 51.938,23.838 55.532,23.838 56.365,23.005 U4.13 56.365,20.635 56.772,20.228 59.228,20.228 ; C14.2 50.172,18.45 49.2,17.478 ; U5.8 52.555,35.7 ; 63,35.7 63.5,35.7 66.2,33 66.2,31.9 C13.2@64.25,29.95 ; C13.2 C13.2@64.25,29.95 ; R7.1 66.25,27.05 65.6,27.7 65.6,28.6 C13.2@64.25,29.95 ; 14.6,13.5 v4(27.3,13.5) ; 14.6,13.5 14.662,13.562 14.662,19.338 14.6,19.4 ; v4(27.3,13.5) 31.29,13.5 31.59,13.2 36.8,13.2 37.3,12.7 42.5,12.7 43.3,13.5 49.2,13.5 49.2,17.478
  Top Layer w0.813: IC1.1 2.7,30.5 4.35,32.15 8.3,36.1 30,36.1 31.1,36.1 v2(32.1,37.1) 32.534,37.534 45.631,37.534 47.465,35.7 52.555,35.7 63,35.7
  Bottom Layer w0.61: v4(27.3,13.5) 28.2,14.4 28.2,18.2 29.6,19.6 v4(29.6,19.7) ; v1(49.2,18.1) 49,18.3 49,20.9 v1(49.5,21.4)
  Bottom Layer w0.813: v2(32.1,37.1) 33.44,37.1 35.5,35.04 v2(35.5,35)
IMEAS: C20.2 R10.2 R12.2 U3.6 U7.6 | length 81.6
  Top Layer w0.152: U3.6 33.175,25.025 33.9,24.3 37.031,24.3 38.031,25.3 42.3,25.3 43,24.6 43,18.7 v1(42.8,18.5) ; R12.2 C20.2 71.3,31.45 73.575,29.175 ; U7.6 73.575,29.175 ; v1(74.767,27) R10.2 73.25,28.85 73.575,29.175
  Bottom Layer w0.152: v1(42.8,18.5) 43,18.3 46,18.3 46.7,17.6 46.7,15.127 50.6,11.227 50.6,9.8 53,7.4 62,7.4 66.6,12 67.6,12 68.835,13.235 68.835,21.068 v1(74.767,27)
IMEAS_RANGESEL: R11.2 R12.1 | length 1.9
  Top Layer w0.152: R11.2 67.3,33.05 R12.1
MOSI: U1.14 U3.10 | length 17.8
  Top Layer w0.152: U1.14 21.095,20.405 21.9,19.6 26.255,19.6 v1@26.7,20.045 ; v1(26.7,20) v1@26.7,20.045 ; U3.10 30.575,22.875 31.2,22.25 31.15,22.25 v1(31.1,22.3) ; v1@26.7,20.045 26.845,20.045 26.795,20.095 26.7,20.19 v1@26.7,20.045
  Bottom Layer w0.152: v1(26.7,20) 26.9,20.2 26.9,20.8 27.9,21.8 28.4,22.3 v1(31.1,22.3)
NetC20_1: C20.1 R7.2 R10.1 R11.1 U7.2 | length 10.1
  Top Layer w0.152: R7.2 C20.1 ; R11.1 67.2,31.35 C20.1 ; R10.1 71.75,29.65 71.575,29.825 U7.2 68.725,29.825 C20.1
NetLED1_1: LED1.1 R1.1 | length 4.2
  Top Layer w0.152: LED1.1 2,11.9 1.3,12.6 1.3,13.2 2,13.9 R1.1
NetLED2_1: LED2.1 R2.1 | length 2.3
  Top Layer w0.152: R2.1 3.75,11.1 LED2.1
NetR5_2: R5.2 U7.3 | length 2.1
  Top Layer w0.305: R5.2 69.225,29.175 U7.3
NLED1: LED1.2 U3.12 | length 42.4
  Top Layer w0.152: LED1.2 2,8.5 2.3,8.2 4.5,8.2 5,8.7 5,9.719 8.381,13.1 12.215,13.1 13.553,11.762 14.247,11.762 15.085,12.6 29.3,12.6 v1(29.6,12.3) ; U3.12 31.225,17.84 32.565,16.5 v1(33,16.5)
  Bottom Layer w0.152: v1(29.6,12.3) 33,15.7 v1(33,16.5)
NLED2: LED2.2 U3.13 | length 40
  Top Layer w0.152: LED2.2 4.2,9.35 8.255,13.405 12.341,13.405 13.679,12.067 14.121,12.067 14.959,12.905 30.295,12.905 v1(30.7,12.5) ; U3.13 31.867,20.292 31.867,17.629 32.456,17.04 v1(33.638,17.04)
  Bottom Layer w0.152: v1(30.7,12.5) 33.638,15.438 v1(33.638,17.04)
PGND: C1.2 C5.2 C6.2 C7.2 Q1.2 Q2.2 Q3.2 Q4.2 Q5.2 Q6.2 Q7.2 Q8.2 Q9.2 Q10.2 Q11.2 Q12.2 Q13.2 Q14.2 Q15.2 Q16.2 Q17.2 Q18.2 Q19.2 Q20.2 Q21.2 Q22.2 Q23.2 Q24.2 Q25.2 Q26.2 Q27.2 Q28.2 Q29.2 Q30.2 Q31.2 Q32.2 R5.1 R6.1 | length 2.3
  Top Layer w0.813: R6.1 68.6,25.6 R5.1
RESET: C4.1 J5.1 R4.1 U3.4 | length 37
  Top Layer w0.152: U3.4 34.475,25.144 34.819,24.8 37.1,24.8 37.905,25.605 42.595,25.605 43.4,24.8 ; v1@43.048,17.656 43.4,18.008 43.4,24.8 ; C4.1 R4.1 43.45,24.75 43.4,24.8
  Bottom Layer w0.152: J5.1 41.19,3.59 41.8,4.2 41.8,7.9 41.4,8.3 41.4,14 43.1,15.7 v1(43.1,17.6)
RS485_DN: J1.4 U2.6 | length 53.2
  Top Layer w0.152: U2.6 41.135,29.935 41.595,30.395 46.505,30.395 47.8,29.1 54.291,29.1 54.627,29.437 58.563,29.437 59.5,28.5 59.5,25.969 65.669,19.8 82.58,19.8 J1.4
RS485_DP: J1.3 U2.7 | length 56
  Top Layer w0.152: U2.7 39.865,29.465 41.1,30.7 46.631,30.7 47.926,29.405 54.164,29.405 54.501,29.741 60.759,29.741 61.433,29.067 61.433,28.608 60.8,27.975 60.8,25.1 65.795,20.105 82.645,20.105 J1.3
RX: U2.1 U3.9 | length 9
  Top Layer w0.152: U3.9 31.225,25.075 33.014,23.286 38.359,23.286 U2.1
SCLK: U1.11 U3.11 U4.11 U5.11 U6.11 | length 79.4
  Top Layer w0.152: U6.11 21.095,27.235 23.081,25.248 23.081,20.771 23.4,20.453 24.653,20.453 24.905,20.705 U1.11 24.905,22.405 25.89,23.39 27.755,23.39 28.303,22.842 28.303,19.478 29.108,18.673 29.108,18.663 32.414,15.357 33.657,15.357 34.233,15.933 34.933,15.933 v1(35.1,16.1) 35.285,16.1 38.081,18.895 41.067,18.895 42.262,17.7 42.262,17.253 42.753,16.762 43.447,16.762 44.181,17.495 44.833,17.495 51.771,24.433 55.736,24.433 57.081,23.088 57.081,20.934 57.244,20.771 58.371,20.771 58.905,21.305 U4.11 58.905,23.884 56.919,25.871 56.919,28.066 56.756,28.229 55.444,28.229 55.095,27.88 U5.11 ; U3.11 30.575,18.059 32.667,15.967 33.367,15.967 v1(34.4,17)
  Bottom Layer w0.152: v1(34.4,17) 34.4,16.8 v1(35.1,16.1)
STROBE: U1.12 U3.18 U4.12 U5.12 U6.12 | length 60.7
  Top Layer w0.152: U6.12 22.365,26.535 23.705,25.195 U1.12@23.705,22.07 ; U1.12 23.635,22 U1.12@23.705,22.07 ; U3.18 35.125,19.475 35.705,18.895 36.405,18.895 37.027,18.273 ; U5.12 56.365,24.235 ; U4.12 57.635,22.965 56.365,24.235 ; U1.12@23.705,22.07 25.33,23.695 27.882,23.695 28.608,22.969 28.608,19.604 29.413,18.799 29.413,18.79 32.541,15.662 33.531,15.662 34.107,16.238 34.392,16.238 34.605,16.45 34.833,16.679 35.433,16.679 37.027,18.273 ; 37.027,18.273 37.954,19.2 41.193,19.2 42.567,17.827 42.567,17.379 42.879,17.067 43.321,17.067 43.633,17.379 44.054,17.8 44.707,17.8 51.645,24.738 55.862,24.738 56.365,24.235
SWCLK: J5.2 U3.20 | length 15.9
  Top Layer w0.152: U3.20 36.825,19.9 v1(37.2,19.9)
  Bottom Layer w0.152: v1(37.2,19.9) 38.105,18.995 38.105,8.125 J5.2
SWDIO: J5.3 U3.19 | length 23.7
  Top Layer w0.152: U3.19 35.775,19.425 36,19.2 37,19.2 v1(37.1,19.1)
  Bottom Layer w0.152: v1(37.1,19.1) 37.8,18.4 37.8,6.5 39.433,4.867 40.871,4.867 41.4,5.395 41.4,7.37 J5.3 ; J5.3@40.1,8.87 J5.3@40.2,8.77
TX: U2.4 U3.8 | length 16.4
  Top Layer w0.152: U3.8 31.875,25.125 33.41,23.59 37.262,23.59 38.2,24.529 39.071,24.529 39.2,24.4 39.2,21.997 39.625,21.571 42.271,21.571 42.405,21.705 U2.4
TXEN: U2.2 U2.3 U3.7 | length 11.9
  Top Layer w0.152: U3.7 32.525,25.175 33.805,23.895 37.057,23.895 37.995,24.833 39.467,24.833 39.865,24.435 U2.2 39.976,23.161 41.024,23.161 U2.3
VCC: C10.1 C11.1 C12.1 C13.1 C14.1 C15.1 IC1.2 IC1.4 J4.1 R1.2 R2.2 R4.2 R8.1 R9.1 U1.16 U2.8 U3.16 U4.16 U5.16 U6.16 | length 229.8
  Top Layer w0.152: J4.1@1.8,39.37 0.6,38.17 0.6,35.2 1.2,34.6 1.2,16.8 R1.2 2,15.7 2.8,14.9 2.8,14 ; R2.2 2.5,13 2.8,13.3 2.8,14 ; 8.5,26.1 8.5,21 13.9,15.6 v1(13.9,14.2) ; v1(13.9,12.6) 13.668,12.6 12.558,13.71 7.864,13.71 7.221,13.067 4.807,13.067 3.873,14 2.8,14 ; U2.8 38.595,26.805 39.15,26.25 R4.2
  Top Layer w0.406: C11.1 16.875,21.825 U1.16 ; C14.1 52.175,21.825 U4.16 ; U5.16 62.625,27.175 C13.1@63.725,28.275 ; C13.1 C13.1@63.725,28.275 ; R9.1 67.1,22.6 63.725,25.975 C13.1@63.725,28.275
  Top Layer w0.508: U3.16 33.825,18.725 C10.1
  Top Layer w0.61: U6.16 28.441,28.175 ; 28.441,30.736 28.441,28.175 ; R8.1 29.1,27.516 28.441,28.175
  Top Layer w0.813: IC1.2 IC1.4 6.85,26.1 8.5,26.1 C15.1 12.6,26.1 ; 24.2,30.736 17.236,30.736 12.6,26.1 ; 24.265,30.736 28.441,30.736 28.458,30.736 29.5,31.779 C12.1 29.59,32.05 34.109,36.568 45.232,36.568 47.07,34.73 47.07,31.55 ; C10.1 35.327,18.3 v3(35.328,18.228) ; v3(37.1,15.9) 37.1,14.1 ; U2.8 38.595,29.195 40.765,31.365 47.07,31.365 48.335,30.1 53.9,30.1 54.176,30.376 61.624,30.376 C13.1@63.725,28.275 ; C14.1 50.277,19.927 49.127,19.927 47,17.8 47,15.787 45.795,14.582 43.173,14.582 43.167,14.588 42.179,13.6 37.8,13.6 37.3,14.1 37.1,14.1 ; 12.6,26.1 16.875,21.825 19.735,18.965 27.046,18.965 27.348,18.664 27.358,18.664 27.864,18.158 27.864,18.148 31.899,14.112 35.196,14.112 35.208,14.1 37.1,14.1
  Bottom Layer w0.152: v1(13.9,12.6) v1(13.9,14.2)
  Bottom Layer w0.813: v3(35.328,18.228) 35.9,18.228 35.936,18.264 37.1,17.1 v3(37.1,15.9)
XT1: C2.2 U3.2 Y1.1 | length 8.8
  Top Layer w0.152: C2.2 35.75,31.8 Y1.1 34.2,29.5 34.2,28.1 35.775,26.525 U3.2
XT2: C3.1 U3.3 Y1.3 | length 6.8
  Top Layer w0.152: C3.1 Y1.3 33.05,28.75 35.125,26.675 U3.3
pads on no net: Designator1.1 Designator2.1 Designator3.1 Designator4.1 Designator5.1 Designator6.1 J2.3 J3.3 J6.3 J7.3 U3.17 U6.9 U7.1 U7.5 U7.8

## Polygon pours and split planes (outlines as drawn)
+12V on Bottom Layer "VCC_BOT" (solid, pour order 6): 0,0 90,0 90,50 0,50
PGND on Bottom Layer "PGND_BOT" (solid, pour order 5): 8,22 8,21 12,17 17,12 75,12 75,32 72,32 70,34 66,38 51,38 15.2,38 11.2,34 11.2,32.7 8,29.5 8,29
GND on Bottom Layer "GND_BOT" (solid, pour order 4): 80,12 71,12 68,12 69,12 69,21 75,27 75,30 85,30 87,28 87,26 86,25 84,25 80,21
+12V on Top Layer "VCC_TOP" (solid, pour order 12): 0,0 90,0 90,50 0,50 0,0
GND on Top Layer "GND_TOP" (solid, pour order 10): 2.634,15.937 6.684,11.887 69.184,11.887 81.434,24.137 81.434,30.237 81.434,30.837 80.434,31.837 80.234,32.037 72.834,32.037 72.334,32.037 66.534,37.837 66.334,38.037 15.934,38.037 9.934,38.037 2.634,30.737
GND on Top Layer "GND_TOP" (solid, pour order 8): 85,30 75,30 75,27 69,21 69,12 80,12 80,21 84,25 86,25 87,26 87,28

## Keep-outs
Keep-Out Layer:
  the board outline again, w0.254

## Silkscreen, mask and mechanical layers (free items; w line width, h text height)
Top Overlay:
  lines w0.254: 30.2,30.9 30.7,32.1 ; 45.4,25.6 47.1,25.8
  text "cc-by-sa" at 75.4,38.9 h3 r90
  text "2017" at 78.2,38.897 h3 r90
  text "BOOT0" at 5.2,35.8 h1.02 r90
  text "+12V" at 73.7,35.8 h1.52
  text "GND" at 75,12.6 h1.52
  text "olsndot" at 75.4,1.7 h3 r90
  text ".revision" at 77.9,1.7 h3 r90
Bottom Overlay:
  region: 4676 vertices and 0 holes, not listed, extent 8.185,5.311 77.57,50.277
Bottom Solder:
  region: 563 vertices and 0 holes, not listed, extent 35.119,25.016 63.133,41.095
Mechanical 16:
  lines w0.127: -75,-39.24 -69.92,-39.24 ; -75,9.02 -69.92,9.02 ; -75,57.28 -69.92,57.28 ; -2.055,100.42 -2.055,105.5 ; -1.975,-87.5 -1.975,-82.42 ; 70.97,100.42 70.97,105.5 ; 71.05,-87.5 71.05,-82.42 ; 97.72,-74.8 212.02,-74.8 ; 97.72,-67.18 212.02,-67.18 ; 97.72,-59.56 135.82,-59.56 ; 135.82,-82.42 135.82,-67.18 135.82,-51.94 ; 143.995,100.42 143.995,105.5 ; 144.075,-87.5 144.075,-82.42 ; 189.16,-82.42 189.16,-67.18 ; 212.02,-39.24 217.1,-39.24 ; 212.02,9.02 217.1,9.02 ; 212.02,57.28 217.1,57.28 ; 97.72,-82.42 62.16,-82.42 62.16,-51.94 97.72,-51.94 ; 97.72,-82.42 212.02,-82.42 ; 97.72,-82.42 97.72,-51.94 ; 97.72,-51.94 135.82,-51.94 ; 135.82,-51.94 212.02,-51.94 212.02,-82.42 ; 212.02,-82.42 -69.92,-82.42 -69.92,100.46 212.02,100.46 212.02,-82.42 ; -75,-87.5 217.1,-87.5 217.1,105.54 -75,105.54 -75,-87.5
  text "2" at 33.89,102.111 h1.78
  text "3" at 107.042,102.111 h1.78
  text "1" at -38.834,102.071 h1.78
  text "4" at 179.86,102.071 h1.78
  text "A" at -73.095,79.099 h1.78
  text "A" at 213.925,79.099 h1.78
  text "NOTE: Use paper washers under heatsink screws" at 5.7,65.7 h1.52
  text "1" at 15.246,36.111 h1.78
  text "B" at -73.095,31.042 h1.78
  text "B" at 213.925,31.042 h1.78
  text "4" at 31.947,-7.889 h1.78
  text "C" at -73.095,-17.472 h1.78
  text "C" at 214,-18 h1.78
  text "ENGINEER:" at 98.99,-54.48 h1.14
  text "TITLE:" at 137.09,-54.48 h1.14
  text "Olsndot LED Driver" at 144.5,-58.6 h6
  text "PCB DESIGNER:" at 98.99,-61.973 h1.14
  text "Development version" at 144.7,-62.7 h3
  text "D" at -73.095,-65.478 h1.78
  text "D" at 213.925,-65.478 h1.78
  text "DATE:" at 98.99,-69.72 h1.14
  text "PART NO.:" at 137.09,-69.72 h1.14
  text "REV:" at 190.43,-69.72 h1.14
  text ".revision" at 195.2,-71.7 h3
  text ".PRINT_DATE" at 100.26,-72.768 h1.78
  text "FILE NAME:" at 98.99,-77.34 h1.14
  text "DWG NO:" at 137.09,-77.34 h1.14
  text "SCALE:" at 190.43,-77.34 h1.14
  text ".PCB_FILE_NAME_NO_PATH" at 100.26,-80.388 h1.78
  text "1" at -38.754,-85.849 h1.78
  text "2" at 33.89,-85.849 h1.78
  text "3" at 107.042,-85.849 h1.78
  text "4" at 179.94,-85.849 h1.78

## Dimensions
42.1,50 to 5,0 on Mechanical 16
68,26.5 to 72.9,37.6 on Mechanical 16
45,16.5 to 68,25 on Mechanical 16
0,0 to 90,0 on Mechanical 16
7.095,0.5 to 0,5 on Mechanical 16
37.895,0.5 to 7.095,0.5 on Mechanical 16
42.1,0.58 to 37.9,-4 on Mechanical 16

## Text inside footprints (layer, text, board x,y; h text height)
J2: Top Overlay "6" at 27.15,5.475 h1.5 r180; Top Overlay "9" at 18.84,5.475 h1.5 r180; Top Overlay "5" at 17.455,14.875 h1.5 r180; Top Overlay "1" at 28.285,14.875 h1.5 r180
J3: Top Overlay "6" at 62.155,5.555 h1.5 r180; Top Overlay "9" at 53.845,5.555 h1.5 r180; Top Overlay "5" at 52.46,14.955 h1.5 r180; Top Overlay "1" at 63.29,14.955 h1.5 r180
J6: Top Overlay "6" at 52.845,45.025 h1.5; Top Overlay "9" at 61.155,45.025 h1.5; Top Overlay "5" at 62.54,35.625 h1.5; Top Overlay "1" at 51.71,35.625 h1.5
J7: Top Overlay "6" at 17.845,45.025 h1.5; Top Overlay "9" at 26.155,45.025 h1.5; Top Overlay "5" at 27.54,35.625 h1.5; Top Overlay "1" at 16.71,35.625 h1.5